# Altium PCB PCB1.PcbDoc (part 3 of 4)
Units mm, origin at the board's own origin, x right, y up, seen from the top; angles counter-clockwise.
Board outline 125 x 60 mm, 4 copper layers (Top Copper, Top Ref, Botton Ref, Bottom Copper), stack 1.586 mm thick; 166 components, 89 nets, 449 pads, 336 vias.
Unrouted connection lines stored in the file: 10.
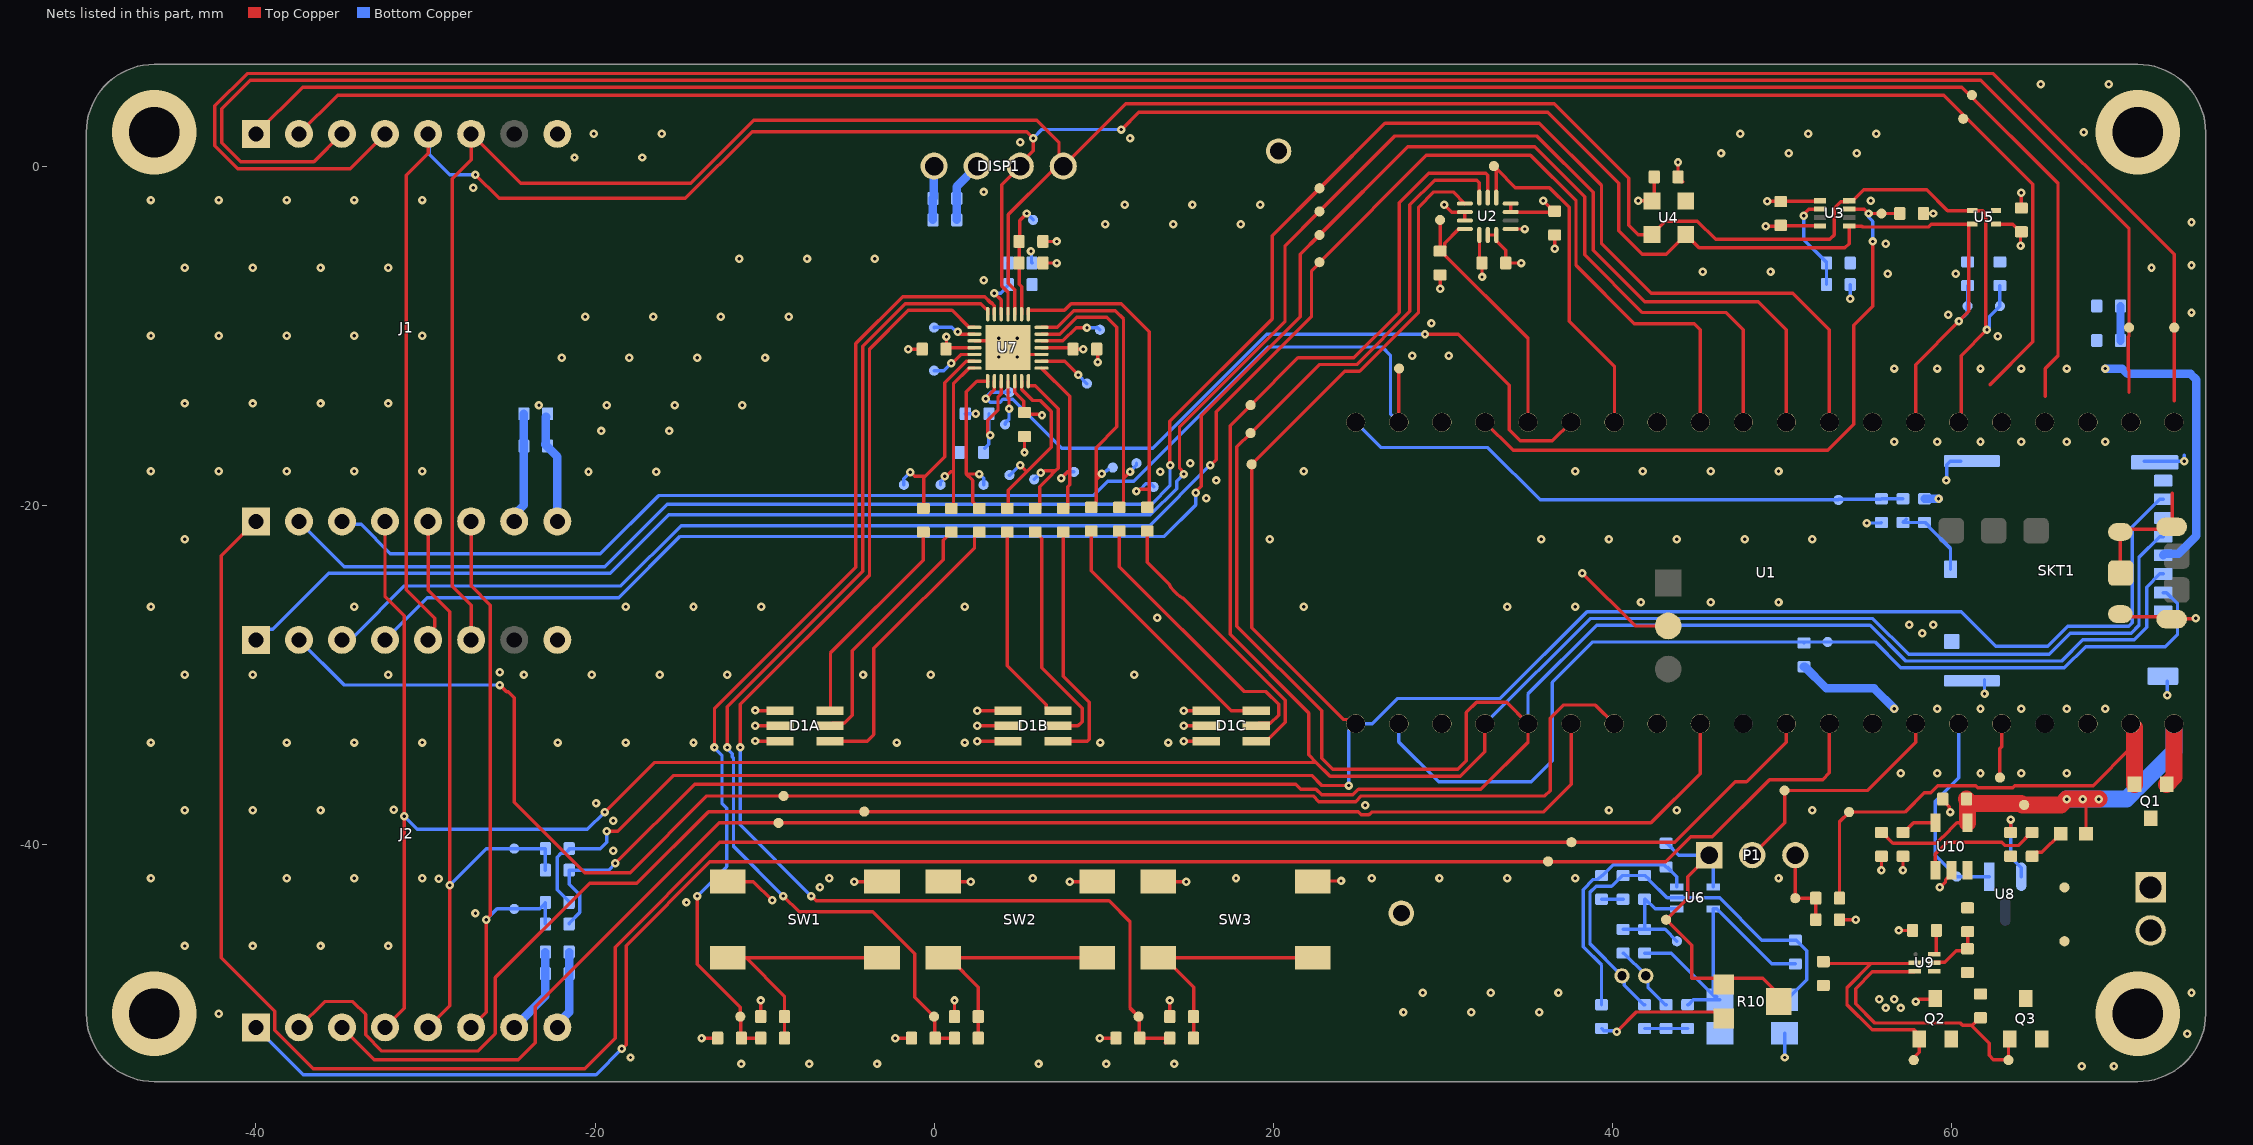
[diagram p4: the nets of this part, all layers, seen from the top]

## Via types
v1: diameter 0.5, hole 0.2, Top Copper to Bottom Copper, tented both sides, 328 vias
v2: diameter 3.2, hole 2.5, Top Copper to Bottom Copper, 4 vias
v3: diameter 5, hole 3, Top Copper to Bottom Copper, 4 vias

## Nets (pads, with @x,y where several pads share a name; then routed paths per layer and width w, separated by ;. In a path a pad name is that pad's centre, name@x,y a point inside that pad or via, vN(x,y) a via of type N, cw(c..) or ccw(c..) an arc to the next point about the centre after c; other vN are vias at no path point) (continued)
LED_RB: LR2.1 R23B.2 U7.13 | length 11
  Top Copper w0.2: R23B.2@4.318,-20.19 4.382,-20.126 4.382,-19.113 5.461,-18.034 ; v1(5.08,-17.653) 5.461,-18.034 ; U7.13@5.16,-12.685 5.16,-13.176 5.808,-13.824 6.267,-13.824 6.916,-14.472 6.916,-16.579 5.461,-18.034
  Bottom Copper w0.2: LR2.1@4.445,-18.224 4.477,-18.224 5.048,-17.653 v1(5.08,-17.653)
LED_RC: LR3.1 R23C.2 U7.20 | length 17.3
  Top Copper w0.2: U7.20@6.335,-9.91 7.423,-9.91 8.408,-8.925 10.195,-8.925 10.776,-9.506 10.776,-15.386 9.559,-16.603 9.559,-18.508 ; R23C.2@9.271,-20.125 9.321,-20.125 9.551,-19.895 9.551,-19.785 9.559,-19.778 9.559,-18.542 9.559,-18.508 ; v1(9.901,-18.155) 9.901,-18.166 9.559,-18.508
  Bottom Copper w0.2: v1(9.901,-18.155) 9.982,-18.155 10.23,-17.907 LR3.1@10.287,-17.907
MB1_MISO: J1.5 J2.5 MB_MISO.1 R32.1 R34.1 | length 38.7
  Top Copper w0.2: J2.5@-29.845,-50.8 -28.575,-49.53 v1(-28.575,-42.418) -28.575,-26.289 -29.845,-25.019 J1.5@-29.845,-20.955
  Bottom Copper w0.2: v1(-28.575,-42.418) -26.416,-40.259 MB_MISO.1@-24.765,-40.259 R32.1@-22.925,-40.259 R34.1@-22.925,-41.529
MB1_MOSI: J1.6 J2.6 MB_MOSI.1 R35.1 R36.1 | length 35.9
  Top Copper w0.2: J2.6@-27.305,-50.8 -26.416,-49.911 -26.416,-44.419 -26.18,-44.183 -26.18,-25.891 -27.305,-24.765 J1.6@-27.305,-20.955
  Bottom Copper w0.2: v1(-26.416,-44.45) -25.781,-43.815 MB_MOSI.1@-24.765,-43.815 -23.256,-43.815 R35.1@-22.925,-43.484 ; R36.1@-22.925,-44.704 R35.1@-22.925,-43.484 ; R35.1@-22.925,-43.434 R35.1@-22.925,-43.484
MIC_OUT: C9.2 MOUT.1 P1.1 R10.1 R10.2 U6.4 | length 19.3
  Top Copper w0.2: P1.1@45.72,-40.64 44.45,-41.91 44.45,-43.18 MOUT.1@43.18,-44.45 44.68,-45.95 44.68,-47.895 46.585,-47.895 48.885,-47.895 49.835,-48.845 R10.2@49.835,-48.895
  Bottom Copper w0.2: C9.2@43.18,-39.94 43.23,-39.94 43.93,-40.64 P1.1@45.72,-40.64 45.965,-40.885 U6.4@45.965,-42.515
NetC7_2: C7.2 R5.1 R6.2 | length 2.5
  Bottom Copper w0.2: C7.2@41.91,-50.865 R6.2@43.18,-50.865 R5.1@44.45,-50.865
NetC8_1: C8.1 MK1.P R6.1 | length 4.2
  Bottom Copper w0.2: C8.1@40.64,-46.42 40.69,-46.42 41.975,-47.705 MK1.P@41.975,-47.76 42.109,-47.894 42.109,-48.444 43.13,-49.465 R6.1@43.18,-49.465
NetC9_1: C9.1 R9.2 R11.1 U6.3 | length 14.3
  Bottom Copper w0.2: R11.1@39.37,-49.465 39.37,-47.121 38.29,-46.041 38.29,-42.673 38.888,-42.075 39.14,-42.075 R9.2@39.37,-41.845 39.42,-41.845 40.05,-41.215 43.055,-41.215 C9.1@43.18,-41.34 43.23,-41.34 43.815,-41.925 U6.3@43.815,-42.515
NetC10_2: C10.2 R9.1 | length 1.3
  Bottom Copper w0.2: R9.1@39.37,-43.245 C10.2@40.64,-43.245
NetC27_2: C27.2 R37.1 U9.5 | length 3.4
  Top Copper w0.2: U9.5@58.995,-46.99 59.035,-46.95 59.62,-46.95 60.28,-46.29 60.96,-46.29 R37.1@60.96,-45.15
NetCOUT_1: COUT.1 Q2.1 R43.2 U9.2 | length 15.1
  Top Copper w0.2: R43.2@52.451,-46.925 52.556,-47.03 55.274,-47.03 ; COUT.1@57.785,-52.705 57.785,-52.597 58.105,-52.277 58.105,-51.242 57.805,-50.942 55.329,-50.942 53.848,-49.461 53.848,-48.456 55.274,-47.03 ; U9.2@57.845,-46.99 57.805,-47.03 55.274,-47.03
NetD1A_1: D1A.1 R25A.1 | length 17.3
  Top Copper w0.2: D1A.1@-6.145,-33.92 -3.948,-33.92 -3.556,-33.528 -3.556,-28.448 2.387,-22.505 2.387,-21.82 2.617,-21.59 R25A.1@2.667,-21.59
NetD1A_2: D1A.2 R24A.1 | length 14.9
  Top Copper w0.2: D1A.2@-6.145,-33.02 -5.995,-32.87 -5.311,-32.87 -4.826,-32.385 -4.826,-28.575 0.535,-23.214 0.535,-22.071 0.736,-21.87 0.736,-21.82 R24A.1@1.028,-21.528
NetD1A_3: D1A.3 R23A.1 | length 12.8
  Top Copper w0.2: D1A.3@-6.145,-32.12 -6.11,-32.085 -6.11,-28.716 -0.635,-23.241 R23A.1@-0.635,-21.59
NetD1B_1: D1B.1 R25B.1 | length 14.7
  Top Copper w0.2: D1B.1@7.317,-33.92 9.027,-33.92 9.144,-33.803 9.144,-31.623 7.62,-30.099 R25B.1@7.62,-21.59
NetD1B_2: D1B.2 R24B.1 | length 13.9
  Top Copper w0.2: R24B.1@5.969,-21.59 6.019,-21.59 6.249,-21.82 6.249,-21.87 6.35,-21.971 6.35,-29.591 8.744,-31.985 8.744,-32.766 8.49,-33.02 D1B.2@7.317,-33.02
NetD1B_3: D1B.3 R23B.1 | length 12.1
  Top Copper w0.2: R23B.1@4.318,-21.59 4.318,-29.464 6.617,-31.763 6.617,-31.97 6.767,-32.12 D1B.3@7.317,-32.12
NetD1C_1: D1C.1 R25C.1 | length 16.3
  Top Copper w0.2: R25C.1@12.573,-21.485 12.573,-23.368 13.867,-24.662 ccw(c15.56,-23.8) 14.698,-25.493 20.574,-31.369 20.72,-31.515 20.72,-32.81 D1C.1@19.596,-33.934
NetD1C_2: D1C.2 R24C.1 | length 17.1
  Top Copper w0.2: R24C.1@10.922,-21.525 10.922,-23.622 18.288,-30.988 19.558,-30.988 20.32,-31.75 20.32,-32.385 19.835,-32.87 19.151,-32.87 D1C.2@19.001,-33.02
NetD1C_3: D1C.3 R23C.1 | length 15.5
  Top Copper w0.2: R23C.1@9.271,-21.525 9.271,-23.866 17.525,-32.12 D1C.3@19.001,-32.12
NetDOUT_1: DOUT.1 Q3.1 R42.2 U9.3 | length 17.6
  Top Copper w0.2: U9.3@57.845,-47.49 57.805,-47.53 55.34,-47.53 54.356,-48.514 54.356,-49.403 55.495,-50.542 60.529,-50.542 60.66,-50.673 61.169,-50.673 ; R42.2@61.722,-50.23 61.672,-50.23 61.229,-50.673 61.169,-50.673 ; Q3.1@63.439,-51.492 63.373,-51.558 63.373,-52.705 62.484,-52.705 62.23,-52.451 62.23,-51.734 61.915,-51.419 61.169,-50.673
NetDS1_2: DS1.2 R38.1 | length 2.2
  Top Copper w0.2: R38.1@64.77,-40.705 65,-40.475 65.34,-40.475 DS1.2@66.445,-39.37
NetIO3_1: IO3.1 U7.2 | length 2.6
  Top Copper w0.2: v1(1.397,-9.779) 1.397,-9.89 1.417,-9.91 U7.2@2.385,-9.91
  Bottom Copper w0.2: IO3.1@0,-9.525 0.011,-9.514 1.051,-9.514 1.316,-9.779 v1(1.397,-9.779)
NetIO4_1: IO4.1 U7.5 | length 2.8
  Top Copper w0.2: v1(1.005,-11.622) 1.078,-11.622 1.59,-11.11 U7.5@2.385,-11.11
  Bottom Copper w0.2: IO4.1@0,-12.065 0.562,-12.065 v1(1.005,-11.622)
NetIO11_1: IO11.1 U7.16 | length 3.2
  Top Copper w0.2: U7.16@6.335,-11.51 7.7,-11.51 v1(8.509,-12.319)
  Bottom Copper w0.2: v1(8.509,-12.319) IO11.1@9.017,-12.827
NetIO12_1: IO12.1 U7.19 | length 3.8
  Top Copper w0.2: U7.19@6.335,-10.31 7.589,-10.31 8.374,-9.525 v1(9.017,-9.525)
  Bottom Copper w0.2: v1(9.017,-9.525) 9.652,-9.525 IO12.1@9.779,-9.652
NetOSCIO_1: OSCIO.1 U7.11 | length 2.7
  Top Copper w0.2: U7.11@4.36,-12.685 4.36,-13.66 4.42,-13.721 v1(4.42,-14.31)
  Bottom Copper w0.2: OSCIO.1@4.191,-15.24 4.191,-15.152 4.42,-14.923 v1(4.42,-14.31)
NetP1_3: P1.3 R31.1 R33.2 VSYSM.1 | length 5
  Top Copper w0.2: P1.3@50.8,-40.64 VSYSM.1@50.8,-43.18 R31.1@52.005,-43.18 R33.2@52.005,-44.45
NetQ2_2: Q2.2 Q3.2
NetR3_1: R3.1 R4.1 U3.2 | length 5.8
  Top Copper w0.2: v1(51.308,-2.921) 51.365,-2.864 51.365,-2.77 51.595,-2.54 U3.2@52.255,-2.54
  Bottom Copper w0.2: v1(51.308,-2.921) 51.308,-4.333 52.64,-5.665 R3.1@52.64,-5.715 R4.1@52.64,-6.985
NetR10_3: R10.3 R11.2 | length 7.8
  Top Copper w0.2: v1(40.259,-51.054) 41.418,-49.895 R10.3@46.585,-49.895
  Bottom Copper w0.2: R11.2@39.37,-50.865 39.502,-50.997 40.202,-50.997 v1(40.259,-51.054)
NetR12_1: R12.1 R13.1 SW1.1 SW1.2 | length 14.8
  Top Copper w0.2: SW1.2@-12.17,-46.7 -11.82,-46.7 -11.085,-46.7 ; R13.1@-8.825,-51.435 R12.1@-8.825,-50.165 -8.825,-48.96 -11.085,-46.7 ; SW1.1@-3.07,-46.7 -11.085,-46.7
NetR14_1: R14.1 R15.1 SW2.1 SW2.2 | length 14.6
  Top Copper w0.2: SW2.2@0.57,-46.74 SW2.2@0.53,-46.7 SW2.2@0.88,-46.7 ; R15.1@2.605,-51.435 R14.1@2.605,-50.165 2.605,-48.425 SW2.2@0.88,-46.7 ; SW2.1@9.63,-46.7 SW2.2@0.88,-46.7
NetR19_1: R19.1 R20.1 SW3.1 SW3.2 | length 14.6
  Top Copper w0.2: SW3.2@13.27,-46.74 SW3.2@13.23,-46.7 SW3.2@13.58,-46.7 ; R20.1@15.305,-51.435 R19.1@15.305,-50.165 15.305,-48.425 SW3.2@13.58,-46.7 ; SW3.1@22.33,-46.7 SW3.2@13.58,-46.7
NetR26_2: R26.2 R27.1 SKT1.9 | length 5
  Bottom Copper w0.2: R27.1@57.342,-20.828 R27.1@57.15,-21.02 R26.2@58.42,-21.02 58.47,-21.02 58.7,-21.25 58.7,-21.3 59.954,-22.554 SKT1.9@59.954,-23.778
NetR38_2: R38.2 U10.1 | length 7.4
  Top Copper w0.2: U10.1@59.06,-41.535 59.06,-40.575 59.757,-39.878 62.987,-39.878 63.184,-40.075 63.95,-40.075 64.72,-39.305 R38.2@64.77,-39.305
NetR39_2: R39.2 U9.6 | length 1.5
  Top Copper w0.2: U9.6@58.995,-46.49 59.08,-46.49 59.12,-46.45 R39.2@59.12,-45.085
NetR40_2: R40.2 U10.5 | length 2.1
  Top Copper w0.2: R40.2@57.15,-39.305 57.2,-39.305 57.77,-38.735 U10.5@59.06,-38.735
NetSKT1_1: SKT1.1
NetSKT1_8: SKT1.8
SX15_ADDR0: R18.2 R22.1 U7.26 | length 3.7
  Top Copper w0.2: v1(3.556,-7.493) 3.96,-7.897 U7.26@3.96,-8.735
  Bottom Copper w0.2: v1(3.556,-7.493) 3.922,-7.493 4.38,-7.035 R22.1@4.38,-5.715
SX15_ADDR1: R17.2 R21.1 U7.10 | length 5.4
  Top Copper w0.2: v1@3.175,-15.748 3.175,-14.986 3.768,-14.393 3.768,-13.623 3.96,-13.431 U7.10@3.96,-12.685
  Bottom Copper w0.2: R17.2@2.986,-16.637 3.216,-16.407 3.216,-16.042 3.302,-15.956 v1(3.302,-15.875) ; v1@3.24,-15.748 R21.1@3.24,-14.605
SX15_NRST: C16.2 R16.1 SX_RST.1 U7.23 | length 6.7
  Top Copper w0.2: U7.23@5.16,-8.735 5.16,-8.244 5.16,-7.114 5.015,-6.969 C16.2@5.015,-5.715 R16.1@5.015,-4.445 5.048,-4.412 5.048,-3.207 v1(5.461,-2.794)
  Bottom Copper w0.2: v1(5.461,-2.794) SX_RST.1@5.842,-3.175
VBAT+: C28.2 J3.1 Q1.3 R37.2 U10.3 VBAT+.1
VBAT-: C27.1 J3.2 Q3.3 R42.1 U9.4 VBAT-.1
VBUS: C29.2 DS1.1 Q1.1 R41.2 U1.40 U10.4 VBUS.1 | length 30.4
  Top Copper w0.2: R41.2@55.88,-39.305 55.93,-39.305 56.56,-39.935 59.124,-39.935 59.474,-39.585 59.484,-39.585 60.334,-38.735 U10.4@60.96,-38.735 ; DS1.1@67.945,-39.37 67.945,-37.592
  Top Copper w0.25: 67.945,-37.592 68.199,-37.338
  Top Copper w1: U10.4@60.96,-38.735 60.96,-37.4 C29.2@60.898,-37.338 61.152,-37.592 64.105,-37.592 64.191,-37.677 66.463,-37.677 v1(66.802,-37.338) v1(67.754,-37.338) 68.199,-37.338 v1(68.707,-37.338) ; Q1.1@72.705,-36.465 73.132,-36.038 U1.40@73.132,-32.887
  Bottom Copper w1: v1(66.802,-37.338) v1(67.754,-37.338) 70.332,-37.338 73.132,-34.537 U1.40@73.132,-32.887
VREF: U1.35 U8.1 VREF.1 | length 12
  Bottom Copper w0.2: U1.35@60.432,-32.887 60.432,-36.088 59.055,-37.465 59.055,-40.64 VREF.1@60.325,-41.91 U8.1@62.23,-41.91
VSYS: Q1.2 R31.2 U1.39 VSYS.1 | length 27.3
  Top Copper w0.2: R31.2@53.405,-43.18 53.405,-38.67 VSYS.1@53.975,-38.1 57.269,-38.1 58.412,-36.957 58.793,-36.957 59.212,-36.538 61.441,-36.538 61.571,-36.668 63.621,-36.668 63.751,-36.538 65.8,-36.538 68.364,-36.538 70.592,-34.31 ; U1.39@70.592,-32.887 U1.39@70.805,-33.1
  Top Copper w1: Q1.2@70.805,-36.465 70.805,-34.31 U1.39@70.805,-33.1
pads on no net: J1.10 J2.10 U1.30 U1.37 U1.E U1.G U1.TP2 U1.TP3 U1.TP4 U1.TP5 U1.TP6 U2.9 U3.3 U3.6 U8.3 U9.1
copper on no net:
  other v2: -7.94,-23.8 15.56,-23.8 -7.94,0 15.56,0

## Polygon pours and split planes (outlines as drawn)
GND on Top Copper "GND_L01_P016" (solid, remove dead copper, pour order 16): -50,-53.975 75.057,-53.975 75.057,6.096 -50,6.096 -50,4.191
+3V3 on Top Copper "+3V3_L01_P014" (solid, remove dead copper, pour order 14): 54.356,-10.541 69.215,-10.541 69.342,-35.56 67.437,-37.465 54.991,-37.465 54.356,-36.83
GND on Top Copper "GND_L01_P009" (solid, pour order 9): 59.436,-49.911 59.563,-49.784 59.563,-48.895 59.436,-48.768 55.245,-48.768 54.991,-49.022 54.991,-49.657 55.626,-49.911 56.261,-49.911
NetQ2_2 on Top Copper "NETQ2_2_L01_P006" (solid, pour order 6): 66.802,-53.594 58.801,-53.594 58.801,-50.292 66.802,-50.292
VBAT- on Top Copper "VBAT-_L01_P005" (solid, pour order 5): 74.295,-43.56 74.295,-46.355 74.168,-46.482 67.945,-46.482 64.516,-49.911 64.008,-49.403 58.401,-49.403 58.401,-47.371 63.626,-47.371 67.437,-43.56